# Altium PCB 400150.PcbDoc
Units mil, origin at the board's own origin, x right, y up, seen from the top; angles counter-clockwise.
Board outline 4000 x 2500 mil, 4 copper layers (Top Layer, Mid-Layer 1, Mid-Layer 2, Bottom Layer), stack 62.293 mil thick; 17 components, 98 nets, 82 pads, 16 vias.
Unrouted connection lines stored in the file: 17.
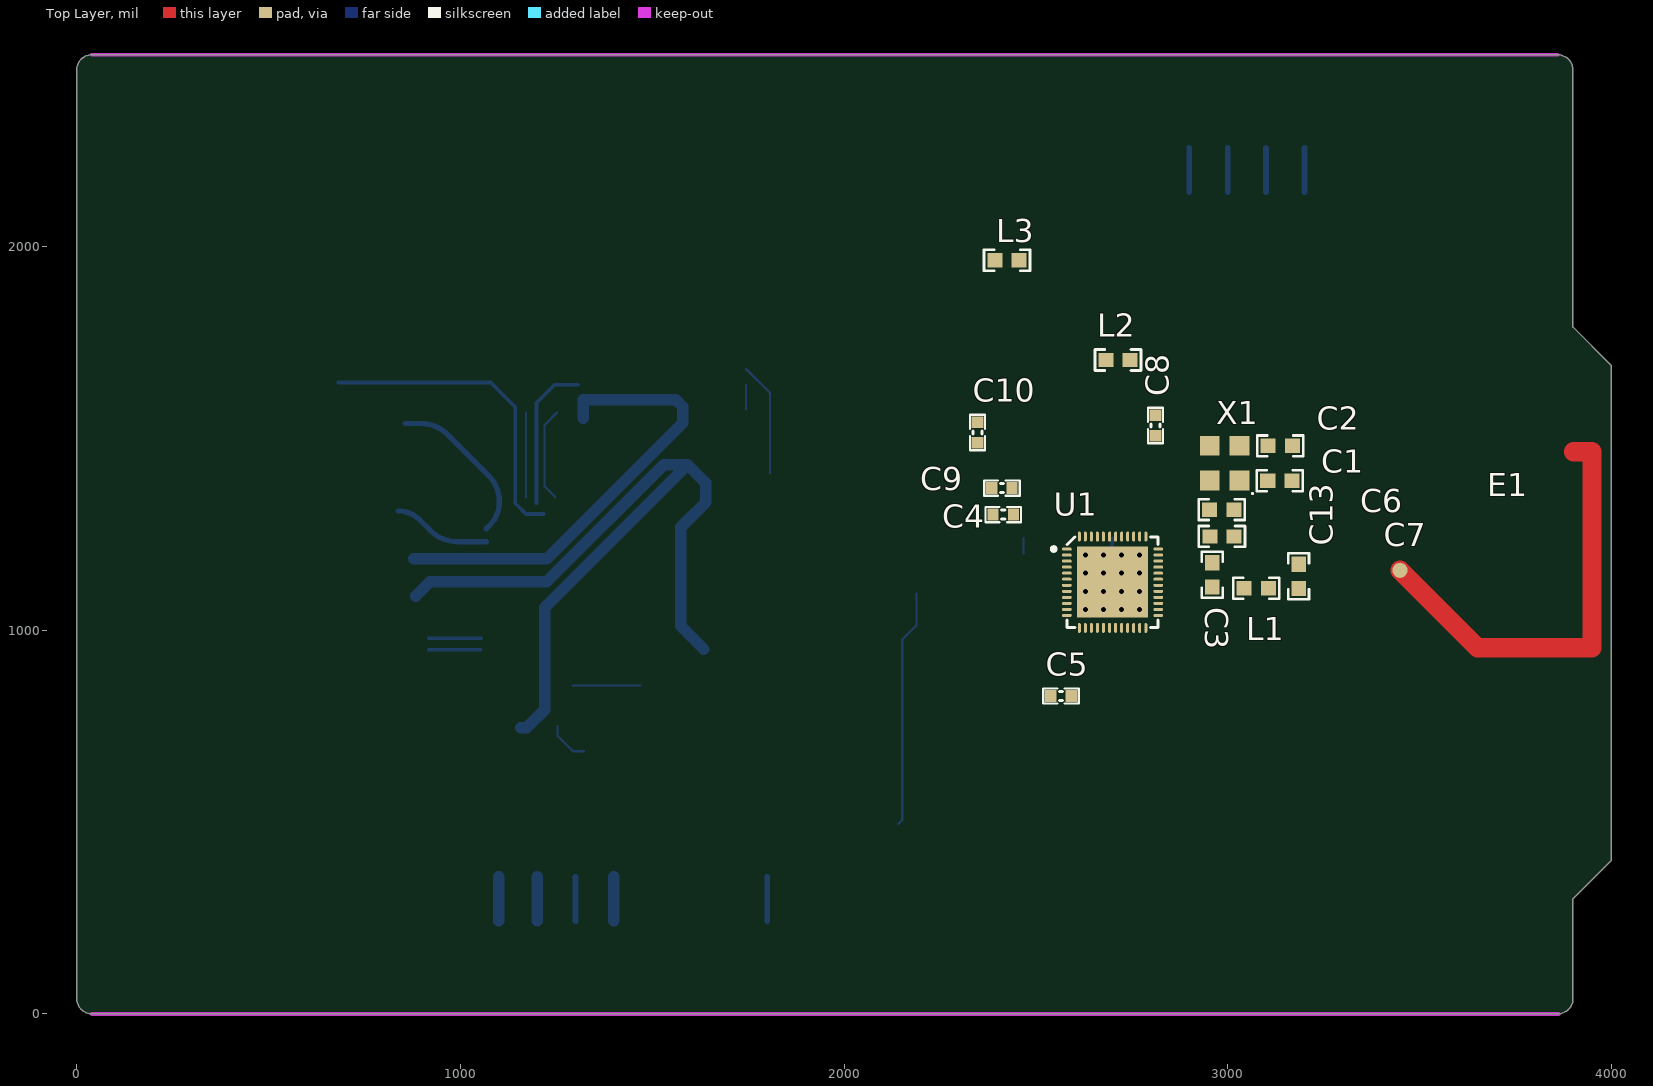
[diagram p0: Top Layer view]
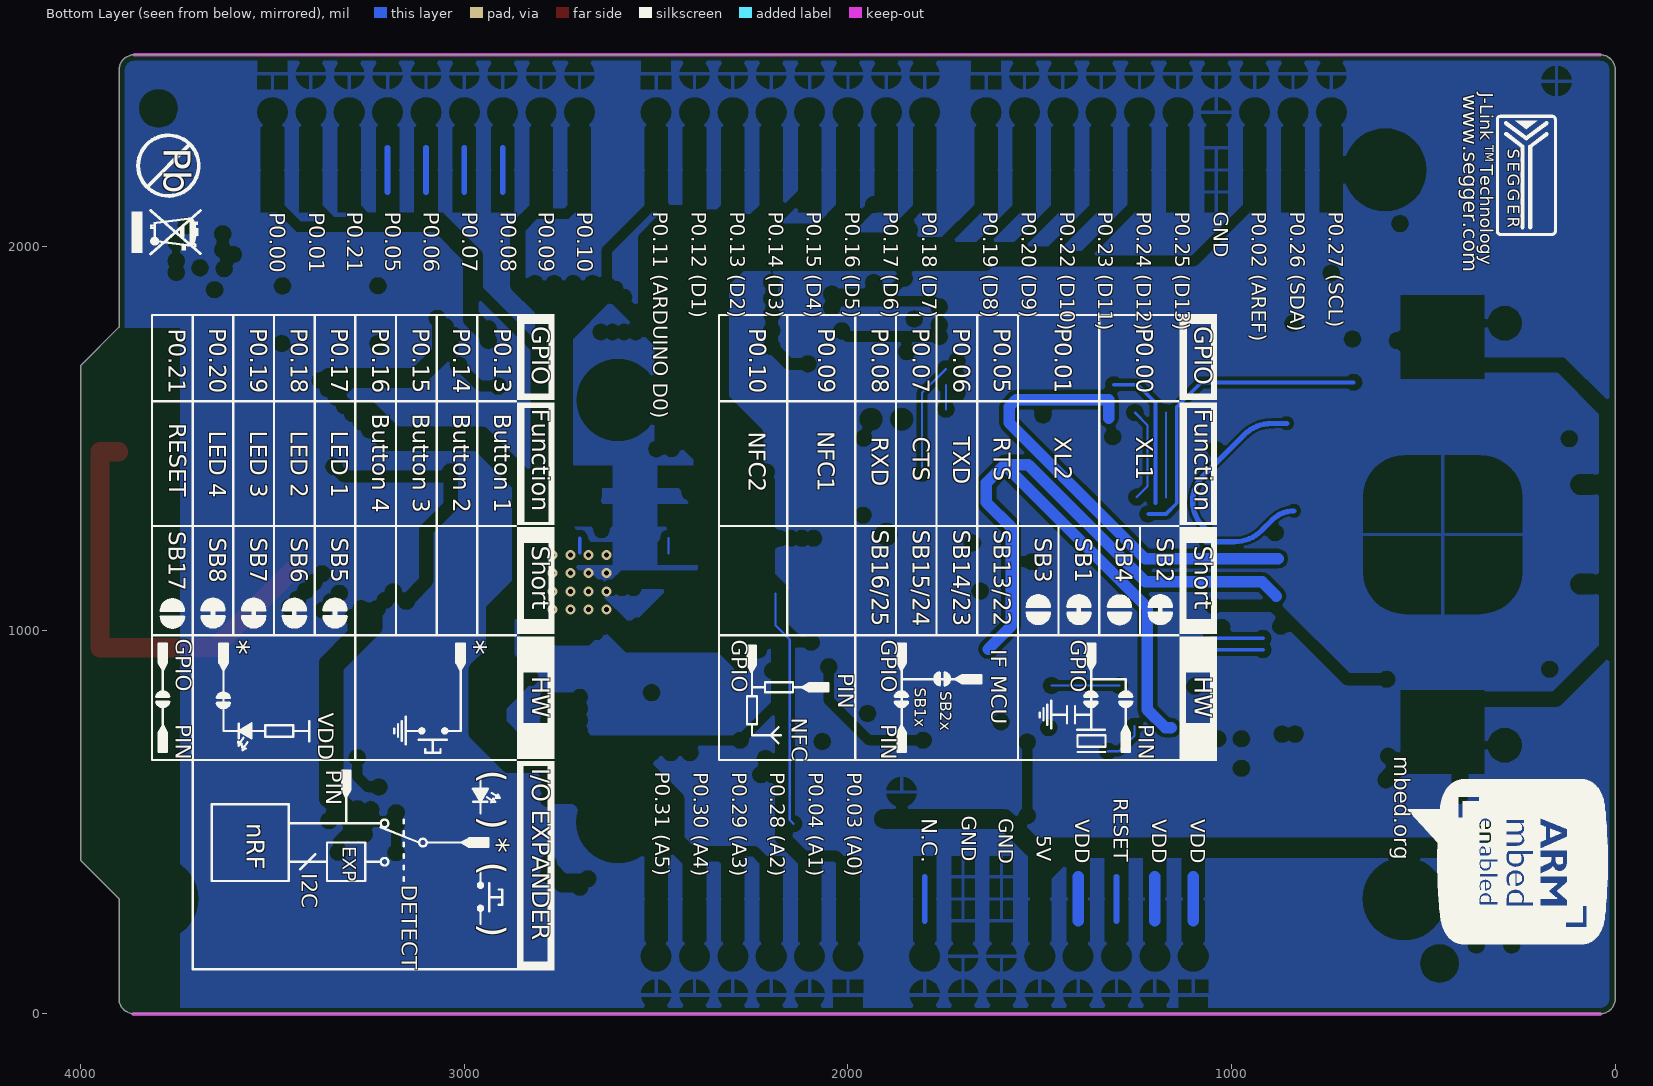
[diagram p1: Bottom Layer view, seen from below]
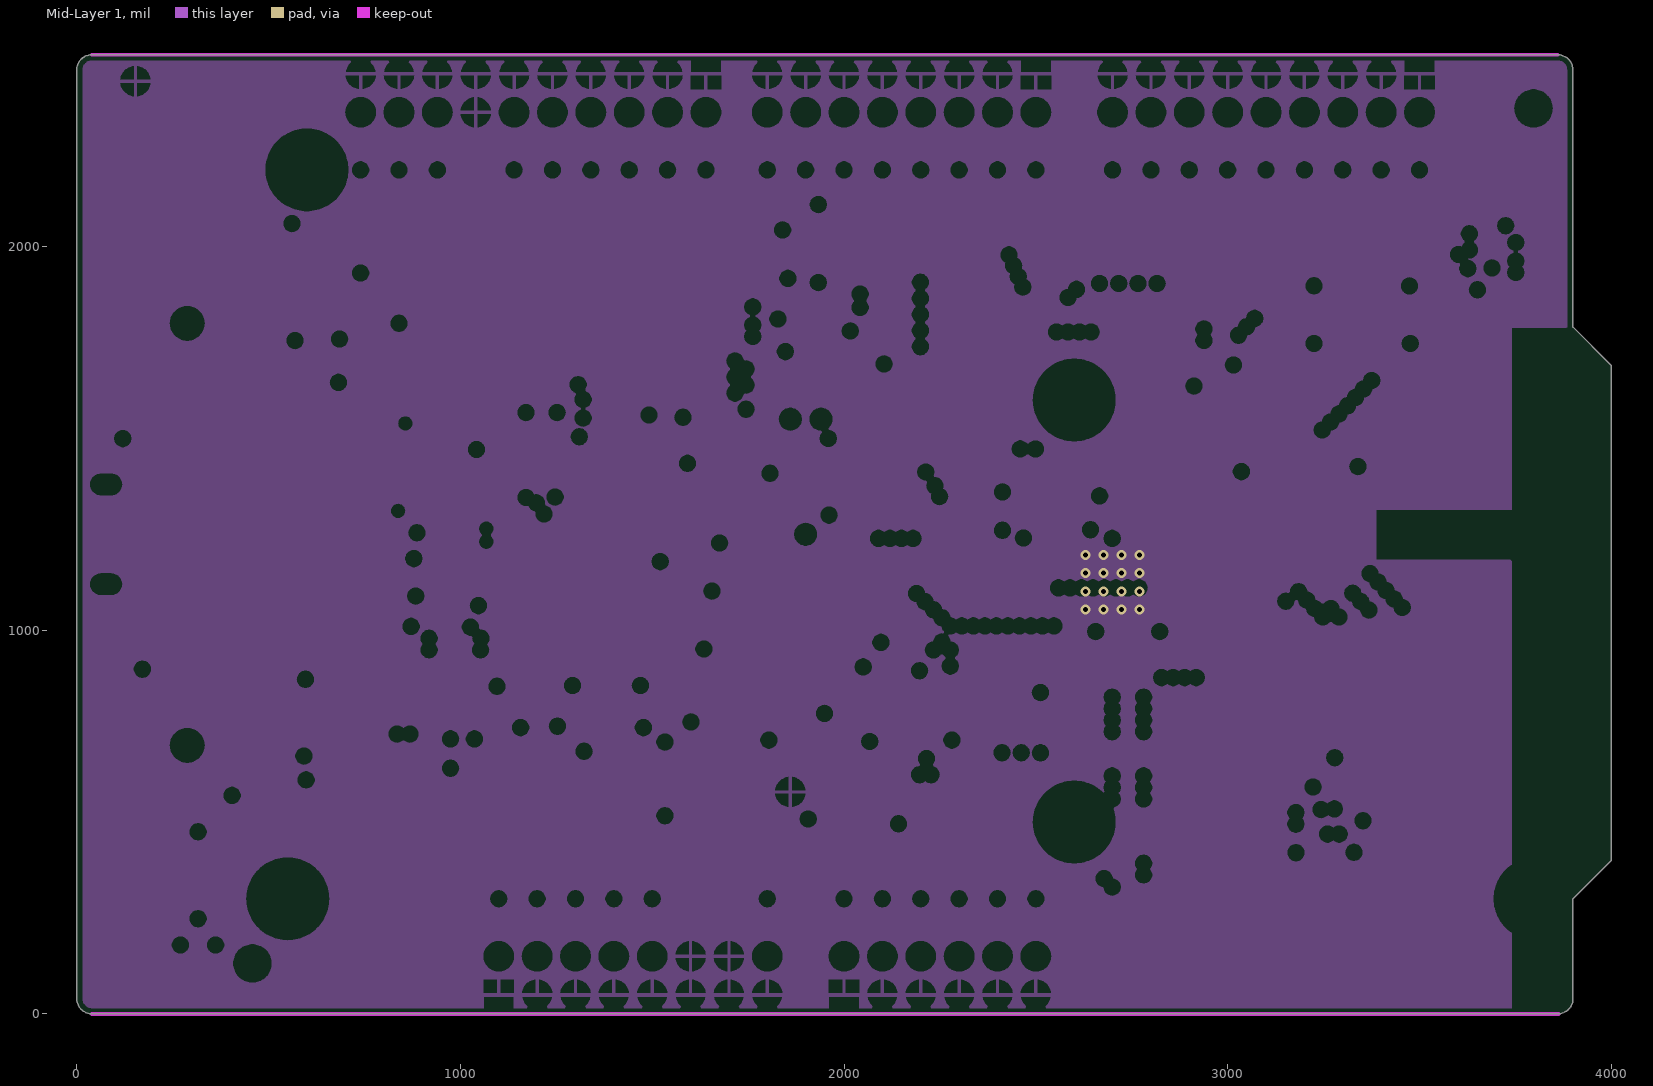
[diagram p2: Mid-Layer 1]
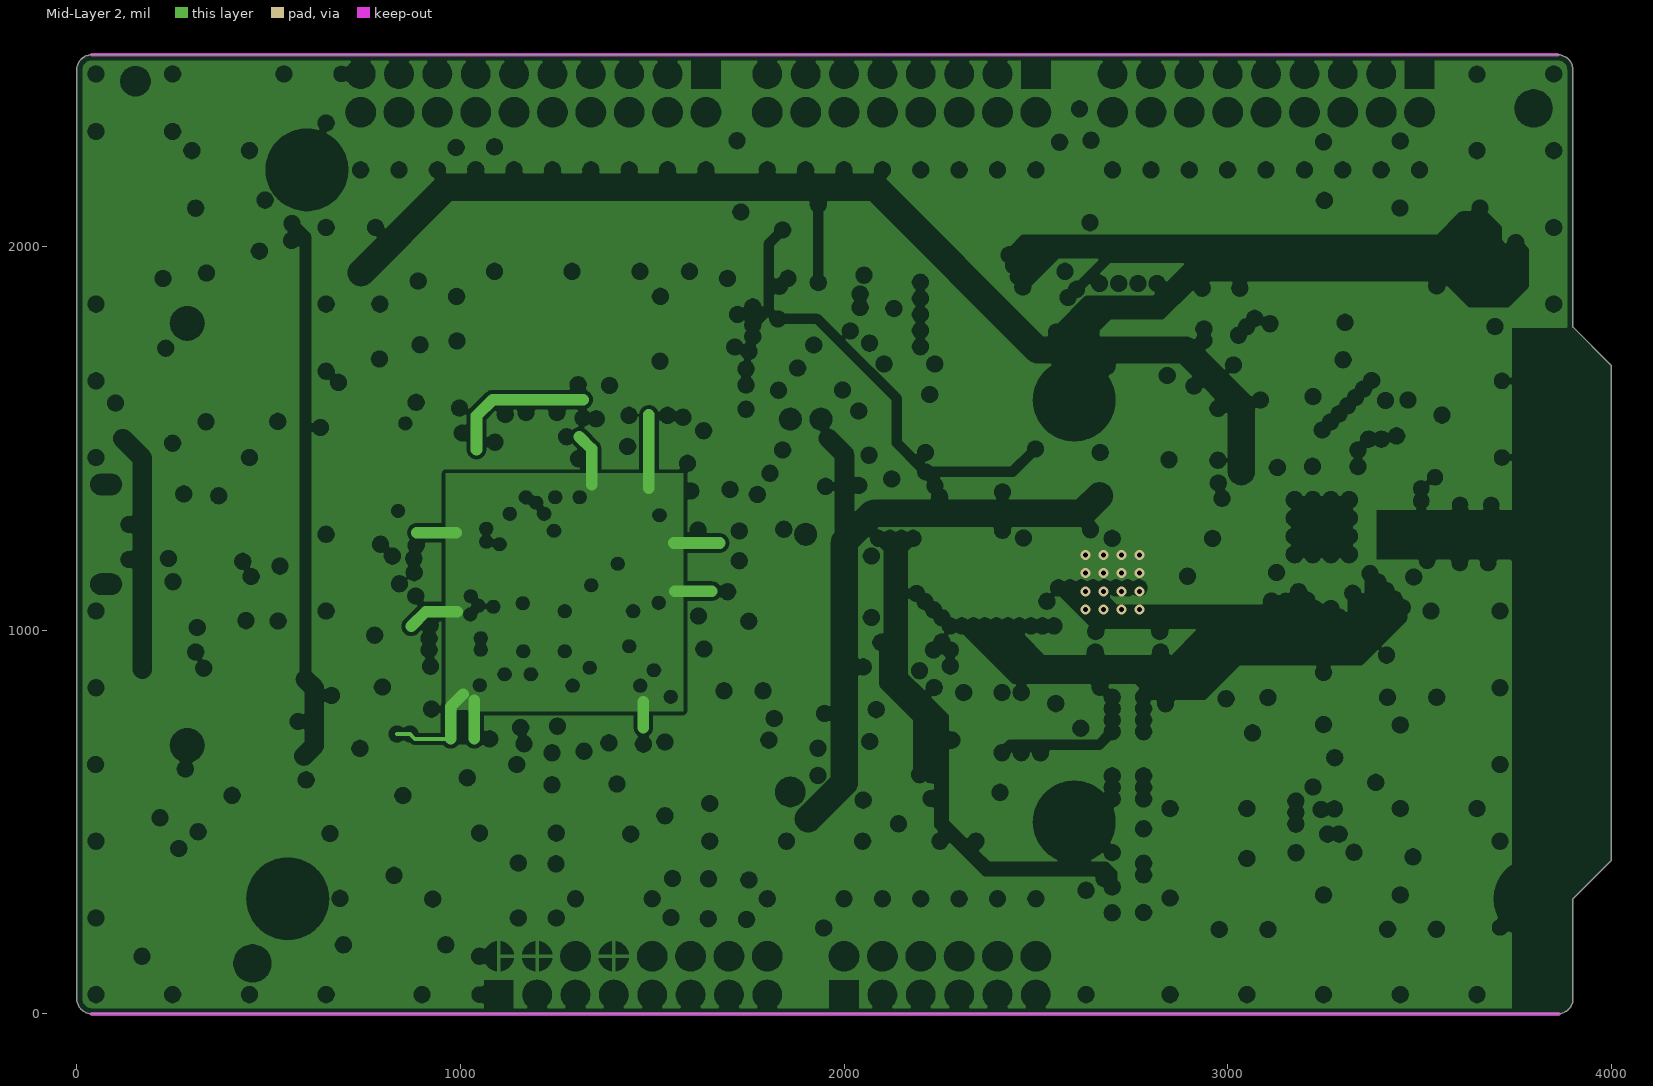
[diagram p3: Mid-Layer 2]

## Layer stack, top to bottom
Top Solder: solder mask 0.4, Solder Resist, Dk 3.5
Top Layer: signal copper 1.4
Dielectric1: prepreg 7.0866, FR-4, Dk 4.4
Mid-Layer 1: signal copper 1.4
Dielectric2: core 42.5197, FR-4, Dk 4.4
Mid-Layer 2: signal copper 1.4
Dielectric3: prepreg 7.0866, FR-4, Dk 4.4
Bottom Layer: signal copper 1.4
Bottom Solder: solder mask 0.4, Solder Resist, Dk 3.5

## Board outline
0,39.6 0,2460.6 cw(c39.5,2460.1) 40,2499.6 3860,2499.6 cw(c3860,2459.6) 3900,2459.6 3900,1789.6 4000,1689.6 4000,399.6 3900,299.6 3900,39.6 cw(c3860.5,39.1) 3861,-0.4 40,-0.4 cw(c40,39.6)

## Design rules (kind name [scope] priority, off if disabled: settings)
Clearance USB_Poly_Clearance [(InNamedPolygon('Top_Layer-GND')) vs (OnLayer('Mechanical 3'))] p1: gap=10
Clearance USB_Clearance [(InDifferentialPairClass('All Differential Pairs'))] p2: gap=6
Clearance ANT_Clerance [InNet('ANT') or InNet('RF')] p3: gap=8
Clearance Polygon_Clearance [(InNamedPolygon('Top_Layer-GND')) or (InNamedPolygon('Bottom_Layer-GND')) or (InNamedPolygon('Mid_Layer_1-GND')) or (InNamedPolygon('Mid_Layer_2-VDD'))] p4: gap=10
Clearance SB_Clearance [HasFootprint('Solderbridge') or HasFootprint('QFN40P180X140X55-10N')] p5: gap=5
Clearance CSP_Clearance [HasFootprint('BGA4C40P2X2_76X76X62')] p6: gap=5
Clearance P23_Clearance [HasFootprint('FPC_05P-0.5mm-RA-SMD')] p7: gap=5
Clearance [All] p8: gap=6
ComponentClearance [All] p1 off: gap=10 collisioncheckmode=3 verticalgap=10 showdistances=FALSE
DiffPairsRouting [All] p1: maxlimit=10 minlimit=5.91 mostfreqgap=10 toplayer_maxgap=5.91 toplayer_prefgap=5.91 toplayer_minwidth=8 toplayer_maxwidth=15 toplayer_prefwidth=15 midlayer1_mingap=10 midlayer1_minwidth=8 midlayer1_maxwidth=15 midlayer1_prefwidth=15 midlayer2_mingap=10 midlayer2_minwidth=8 midlayer2_maxwidth=15 midlayer2_prefwidth=15 bottomlayer_maxgap=5.91 bottomlayer_prefgap=5.91 bottomlayer_minwidth=8 bottomlayer_maxwidth=15 bottomlayer_prefwidth=15 maxuncoupledlength=500
FabricationTestPointUsage TestPointUsage [All] p1: valid=0 allowmultiple=FALSE
FabricationTestpoint Testpoint [All] p1: side=3 testpointundercomponent=TRUE minsize=40 maxsize=100 preferedsize=60 minholesize=0 maxholesize=40 preferedholesize=32 testpointgrid=1 allowsidetop=TRUE allowsidebottom=TRUE usegrid=TRUE gridtolerance=0.01
Height [All] p1 off: minheight=0 maxheight=1000 prefheight=500
HoleSize [All] p1: absolutevalues=TRUE maxlimit=196.85 minlimit=12 maxpercent=80.000 minpercent=20.000
MinimumAnnularRing [All] p1 off: minimumring=6
PolygonConnect PolygonConnect_1 [isVia and innet(gnd) or isVia and innet('VDD') or HasFootprint('COAXIAL-SWF') or isVia and innet('VDD_SAM')] p1: connectstyle=Direct reliefconductorwidth=10 reliefentries=4 polygonreliefangle="90 Angle" airgapwidth=10
PolygonConnect [All] p2: connectstyle=Relief reliefconductorwidth=10 reliefentries=4 polygonreliefangle="90 Angle" airgapwidth=10
RoutingVias [All] p1: holewidth=12 width=24 viastyle="Through Hole" minholewidth=12 minwidth=24 maxholewidth=28 maxwidth=50
SilkToSolderMaskClearance SilkscreenOverComponentPads [IsPad] p1: minsilkscreentomaskgap=10 clearancetoexposedcopper=TRUE
SolderMaskExpansion [All] p1: expansion=3
Width [All] p1: maxlimit=400 minlimit=6 preferedwidth=6 minimp=50.000000 maximp=50.000000 favimp=50.000000
23 further rules are at their usual default settings.

## Classes and differential pairs
component class pca10040_sheet1_radio: C1 C2 C3 C4 C5 C6 C7 C8 C9 C10 E1 L1 L2 L3 U1 X1

## Components (designator, comment, footprint, x,y, rotation, side; value= is the part's Value field where it differs from the comment)
C1 "12pF" 0603 3136,1389 r0 top
C2 "12pF" 0603 3137,1480 r0 top
C3 "0.8pF" 0603 2960,1144 r270 top
C4 "100nF" CAPC1608X06L 2415,1301 r180 top
C5 "100nF" CAPC1608X06L 2565.57,828 r0 top
C6 "N.C." 0603 2985,1244 r0 top
C7 "100pF" 0603 2984.5,1314 r0 top
C8 "100nF" CAPC1608X06L 2812,1533.43 r90 top
C9 "4.7µF" CAPC1608X06L 2411.43,1370 r180 top
C10 "1.0µF" CAPC1608X06L 2348,1515 r90 top
C13 "1.2pF" 0603 3185,1140 r90 top
E1 "Antenna" "PCB ANTENNE" 3655,1194 r180 top
L1 "3.9nH" 0603 3074.5,1109 r0 top
L2 "10µH" 0603 2714,1704 r0 top
L3 "15nH" 0603 2425,1964 r0 top
U1 "nRF52832-QFAA" QFN40P600X600X90-48N 2699.91,1124.63 r0 top
X1 "CX3225SB32000D0FFFCC" SON230P260X60-4N 2992,1435 r180 top

## Footprints (in the part's own frame and the unit in brackets; to place one, negate y for a bottom-side part, rotate by r counter-clockwise, add the part's x,y. Pads: shape width x height; smd on the part's side, far side on the other; paste and mask are expansions set on the pad)
0603 [mm] "0603 from SM-752 data"
  rect 1x0.95 smd: 1(-0.8,0) 2(0.8,0)
  silkscreen extent -1.52,-0.69 1.52,0.69, body extent -0.87,-0.47 0.87,0.47, height 1
CAPC1608X06L [mm]
  rect 0.75x0.8 smd: 1(-0.675,0) 2(0.675,0)
  silkscreen extent -1.17,-0.5 1.17,0.5, body extent -0.8,-0.43 0.8,0.43, height 0.8
"PCB ANTENNE" [mm]
  round 1 smd: 1(5.225,0.971)
  Top Layer lines w0.762: 5.2,0.945 5.2,0.907 ; -7.477,-6.851 -7.731,-6.825
  Top Layer lines w1.27: 5.225,0.971 0.092,6.103 ; -6.251,-6.876 -7.477,-6.876 ; -7.477,-6.851 -7.477,6.103 0.092,6.103 ; 0.093,6.103 0.092,6.103
QFN40P600X600X90-48N [mm]
  oval 0.65x0.2 smd: 1(-3.025,2.2) 2(-3.025,1.8) 3(-3.025,1.4) 4(-3.025,1) 5(-3.025,0.6) 6(-3.025,0.2) 7(-3.025,-0.2) 8(-3.025,-0.6) 9(-3.025,-1) 10(-3.025,-1.4) 11(-3.025,-1.8) 12(-3.025,-2.2) 25(3.025,-2.2) 26(3.025,-1.8) 27(3.025,-1.4) 28(3.025,-1) 29(3.025,-0.6) 30(3.025,-0.2) 31(3.025,0.2) 32(3.025,0.6) 33(3.025,1) 34(3.025,1.4) 35(3.025,1.8) 36(3.025,2.2)
  oval 0.2x0.65 smd: 13(-2.2,-3.025) 14(-1.8,-3.025) 15(-1.4,-3.025) 16(-1,-3.025) 17(-0.6,-3.025) 18(-0.2,-3.025) 19(0.2,-3.025) 20(0.6,-3.025) 21(1,-3.025) 22(1.4,-3.025) 23(1.8,-3.025) 24(2.2,-3.025) 37(2.2,3.025) 38(1.8,3.025) 39(1.4,3.025) 40(1,3.025) 41(0.6,3.025) 42(0.2,3.025) 43(-0.2,3.025) 44(-0.6,3.025) 45(-1,3.025) 46(-1.4,3.025) 47(-1.8,3.025) 48(-2.2,3.025)
  rect 4.7x4.7 smd: 49(0,0)
  silkscreen extent -4.02,-3 3,3, body extent -3.02,-3.02 3.02,3.02, height 0.86
SON230P260X60-4N [mm] "SON, 4-Leads, Body 3.25x2.55mm, Pitch 2.30mm, IPC Medium Density"
  rect 1.3x1.3 smd: 1(-0.985,1.15) 2(-0.985,-1.15) 3(0.985,-1.15) 4(0.985,1.15)
  silkscreen extent -1.9,1.96 -1.8,2.06, body extent -1.3,-1.65 1.3,1.65, height 0.6

## Part data
C1 C2: library part C0402-12p, "Capacitor, NP0, ±2%"
C3: library part C0402-0.8p, "Capacitor, NP0, ±5%"
C4 C5 C8: library part C0402-100n, "Capacitor, X7R, ±10%"
C6: library part C0402-N.C., "Not mounted"
C7: library part C0402-100p, "Capacitor, NP0, ±5%"
C9: library part C0603-4µ7, "Capacitor, X5R, ±10%"
C10: library part C0603-1µ0, "Capacitor, X7R, ±10%"
C13: library part C0402-1.2p, "Capacitor, NP0, ±0.1pF"
E1: "Generic Antenna"
L1: library part L0402-3n9, "Inductor, 170mA, ±0.1nH"
L2: library part L0603-10µ, "Inductor, 80mA, ±10%"
L3: library part L0402-15n, "Inductor, 320mA, ±5%"
U1: "Multi-protocol Bluetooth Low Energy and 2.4GHz proprietary system-on-chip"
X1: library part XTAL_SMD2016_32MHz_8pF_Epson, "XTAL SMD 2016, 32MHz, Cl=8pF, Tol: ±10ppm, Stab: ±10ppm"

## Via types
v1: diameter 25.98, hole 12.99, Top Layer to Bottom Layer, 16 vias

## Nets (pads, with @x,y where several pads share a name; then routed paths per layer and width w, separated by ;. In a path a pad name is that pad's centre, name@x,y a point inside that pad or via, vN(x,y) a via of type N, cw(c..) or ccw(c..) an arc to the next point about the centre after c; other vN are vias at no path point)
ANT: C13.1 L1.2
BOOT: 
BUTTON1: 
BUTTON1_EXT: 
BUTTON2: 
BUTTON2_EXT: 
BUTTON3: 
BUTTON3_EXT: 
BUTTON4: 
BUTTON4_EXT: 
DEC1: C4.1 U1.1
DEC2: C6.1 U1.32
DEC3: C7.1 U1.33
DEC4: C10.2 L3.1 U1.46
GND: C1.2 C2.2 C3.1 C4.2 C5.2 C6.2 C7.2 C8.2 C9.2 C10.1 C13.2 U1.31 U1.45 U1.49 X1.2 X1.4
  other v1: 2629.04,1053.76 2676.28,1053.76 2723.53,1053.76 2770.77,1053.76 2629.04,1101.01 2676.28,1101.01 2723.53,1101.01 2770.77,1101.01 2629.04,1148.25 2676.28,1148.25 2723.53,1148.25 2770.77,1148.25 2629.04,1195.5 2676.28,1195.5 2723.53,1195.5 2770.77,1195.5
INT_EXT: 
LED1: 
LED1_EXT: 
LED2: 
LED2_EXT: 
LED3: 
LED3_EXT: 
LED4: 
LED4_EXT: 
NetBat1_1: 
NetC3_2: C3.2 L1.1 U1.30
NetC11_2: 
NetC12_2: 
NetC17_2: 
NetD1_1: 
NetD1_4: 
NetD3_1: 
NetD4_1: 
NetD5_1: 
NetD6_1: 
NetL2_1: L2.1 L3.2
NetL2_2: L2.2 U1.47
NetLED1_1: 
NetLED1_2: 
NetLED2_1: 
NetLED2_2: 
NetLED3_1: 
NetLED3_2: 
NetLED4_1: 
NetLED4_2: 
NetR32_1: 
NetR37_1: 
NetSB30_2: 
NFC1: 
NFC2: 
P0.00: 
P0.01: 
P0.02: U1.4
P0.03: U1.5
P0.04: U1.6
P0.05: U1.7
P0.06: U1.8
P0.07: U1.9
P0.08: U1.10
P0.09: 
P0.09/NFC1: U1.11
P0.10: 
P0.10/NFC2: U1.12
P0.11: U1.14
P0.12: U1.15
P0.13: U1.16
P0.14: U1.17
P0.15: U1.18
P0.16: U1.19
P0.17: U1.20
P0.18: U1.21
P0.19: U1.22
P0.20: U1.23
P0.21: U1.24
P0.22: U1.27
P0.23: U1.28
P0.24: U1.29
P0.25: U1.37
P0.26: U1.38
P0.27: U1.39
P0.28: U1.40
P0.29: U1.41
P0.30: U1.42
P0.31: U1.43
SCL_EXT: 
SDA_EXT: 
SHIELD_DETECT: 
SWDCLK: U1.25
SWDIO: U1.26
V5V: 
VBUS: 
VDD: 
VDD_NRF: C5.1 C8.1 C9.1 U1.13 U1.36 U1.48
VEXT: 
XC1: C1.1 U1.34 X1.1
XC2: C2.1 U1.35 X1.3
XL1: U1.2
XL2: U1.3
pads on no net: E1.1 U1.44
copper on no net: | length 10107.7
  Mid-Layer 2 w10: 834.87,728.91 868.34,728.91 880.87,716.38 974.38,716.38
  Mid-Layer 2 w30: 871.61,1009.6 910.35,1048.34 991.83,1048.34 ; 886.61,1253.6 988.83,1253.6 ; 974.38,716.38 974.38,799.88 1006.83,832.34 ; 1036.44,716.37 1036.44,817.34 ; 1042,1470.6 1042,1558.6 1084,1600.6 1320,1600.6 ; 1310,1503.92 1341.83,1472.09 1341.83,1378.34 ; 1477,745.6 1477,813.34 ; 1491.61,1369.34 1491.61,1560.6 ; 1555.83,1226.91 1675.61,1226.91 ; 1558.83,1101.6 1655.61,1101.6
  Bottom Layer w6: 1171,1345.6 1171,1566.92 ; 1247,1346.6 1219,1374.6 1219,1533.92 1252,1566.92 ; 1252.92,749.37 1252.92,724.54 1293.46,684 1322.35,684 ; 1292.29,855.37 1469.29,855.37 ; 1744.69,1575.6 1744.69,1638.6 ; 1744.69,1680.6 1807,1618.29 1807,1408.6 ; 2142,495 2152,505 2152,975.32 2189,1012.32 2189,1095 ; 2467.69,1199.6 2467.69,1240
  Bottom Layer w10: 682,1645.6 1079,1645.6 1143,1581.6 1143,1330.6 1171,1302.6 1217,1302.6 ; 918.61,948.6 1052.61,948.6 ; 918.61,978.6 1053.61,978.6 ; 1198,1331.6 1198,1592.6 1245,1639.6 1307,1639.6 ; 2699,1201.6 2699,1239
  Bottom Layer w13.78: 837.61,1310.6 cw(c837.61,1230.93) 893.94,1287.27 921.68,1259.53 ccw(c992.39,1330.24) 992.39,1230.24 1067.61,1230.24 ; 856.61,1538.6 896.18,1538.6 cw(c896.18,1438.6) 966.9,1509.31 1073.32,1402.88 cw(c1005.04,1334.6) 1101.61,1334.6 cw(c1013.82,1334.6) 1075.89,1272.53 1067.61,1264.24
  Bottom Layer w15: 1300,241.92 1300,299.6 1300,357.28 ; 1800,241.92 1800,299.6 1800,357.28 ; 2900,2141.92 2900,2199.6 2900,2257.28 ; 3000,2141.92 3000,2199.6 3000,2257.28 ; 3100,2141.92 3100,2199.6 3100,2257.28 ; 3200,2141.92 3200,2199.6 3200,2257.28
  Bottom Layer w30: 878.61,1186.13 1225.53,1186.13 1580,1540.6 1580,1554.6 1580,1581.6 1561,1600.6 1320,1600.6 1320,1552.6 ; 883.61,1088.6 920.61,1125.6 1224.61,1125.6 1530,1430.99 1592,1430.99 ; 1100,241.92 1100,357.28 ; 1157,745.6 1172.61,745.6 1219.61,792.6 1219.61,1058.6 1592,1430.99 ; 1200,241.92 1200,357.28 ; 1400,241.92 1400,357.28 ; 1634.61,950.6 1574.61,1010.6 1574.61,1267.76 1639.61,1332.76 1639.61,1383.39 1592,1430.99

## Polygon pours and split planes (outlines as drawn)
no net on Mid-Layer 2 "NONET_L03_P008" (solid, pour order 8): 962,1408.34 962,788.6 1580.83,788.6 1580.83,1408.34
VDD on Mid-Layer 2 "Mid_Layer_2-VDD" (solid, remove dead copper, pour order 10): -104.87,-142.03 -104.87,2619.48 -96.26,2635.53 4116.93,2635.53 4127.69,2655.6 4127.69,-134 4132,-142.03
GND on Mid-Layer 1 "Mid_Layer_1-GND" (solid, remove dead copper, pour order 7): -138.74,-96.93 -138.74,2579.59 -129.94,2595.15 4177.59,2595.15 4188.6,2614.6 4188.6,-89.15 4193,-96.93
GND on Bottom Layer "Bottom_Layer-GND" (solid, remove dead copper, pour order 6): -410.29,-103.54 -410.29,2687.09 -400.99,2703.32 4149.72,2703.32 4161.35,2723.6 4161.35,-95.43 4166,-103.54

## Keep-outs
Keep-Out Layer:
  lines w10: 40,-0.4 3862,-0.4 ; 40,2499.6 3860,2499.6

## Other copper
Mid-Layer 1:
  pour cut-out: 3742.87,1183.16 3386.87,1183.16 3386.87,1313.16 3742.87,1313.16
  pour cut-out: 3739.97,-50.4 4010.28,-50.4 4008.77,1787.6 3740.14,1787.6
Mid-Layer 2:
  pour cut-out: 990.83,792.34 990.83,702.34 1020.83,702.34 1020.83,792.34
  pour cut-out: 3742.87,1183.16 3386.87,1183.16 3386.87,1313.16 3742.87,1313.16
  pour cut-out: 3739.97,-50.4 4010.28,-50.4 4008.77,1787.6 3740.14,1787.6
Bottom Layer:
  pour cut-out: 3739.97,-50.4 4010.28,-50.4 4008.77,1787.6 3740.14,1787.6

## Silkscreen, mask and mechanical layers (free items; w line width, h text height)
Bottom Overlay:
  drawing of 11657 lines, arcs and shapes, not listed
  text "J-Link" at 363.88,2400.2 h57 r90
  text "www.segger.com" at 409.18,2397 h66 r90
  text "TM" at 347.28,2263.6 h37 r90
  text "Pb" at 3807.28,2257.6 h120 r90
  text "S" at 290.67,2255.2 h53 r90
  text "E" at 290.67,2220.17 h53 r90
  text "Technology" at 363.88,2213.1 h57 r90
  text "G" at 290.67,2189.3 h53 r90
  text "G" at 290.67,2150.3 h53 r90
  text "E" at 290.67,2110 h53 r90
  text "P0.27 (SCL)" at 760,2090.6 h65 r90
  text "P0.26 (SDA)" at 860,2090.6 h65 r90
  text "P0.02 (AREF)" at 960,2090.6 h65 r90
  text "GND" at 1060,2090.6 h65 r90
  text "P0.25 (D13)" at 1160,2090.6 h65 r90
  text "P0.24 (D12)" at 1260,2090.6 h65 r90
  text "P0.23 (D11)" at 1360,2090.6 h65 r90
  text "P0.22 (D10)" at 1460,2090.6 h65 r90
  text "P0.20 (D9)" at 1560,2090.6 h65 r90
  text "P0.19 (D8)" at 1660,2090.6 h65 r90
  text "P0.18 (D7)" at 1820,2090.6 h65 r90
  text "P0.17 (D6)" at 1920,2090.6 h65 r90
  text "P0.16 (D5)" at 2020,2090.6 h65 r90
  text "P0.15 (D4)" at 2120,2090.6 h65 r90
  text "P0.14 (D3)" at 2220,2090.6 h65 r90
  text "P0.13 (D2)" at 2320,2090.6 h65 r90
  text "P0.12 (D1)" at 2420,2090.6 h65 r90
  text "P0.11 (ARDUINO D0)" at 2520,2090.6 h65 r90
  text "P0.10" at 2720,2090.6 h70 r90
  text "P0.09" at 2820,2090.6 h70 r90
  text "P0.08" at 2920,2090.6 h70 r90
  text "P0.07" at 3020,2090.6 h70 r90
  text "P0.06" at 3120,2090.6 h70 r90
  text "P0.05" at 3220,2090.6 h70 r90
  text "P0.21" at 3320,2090.6 h70 r90
  text "P0.00" at 3521,2089.6 h70 r90
  text "P0.01" at 3419,2089.28 h70 r90
  text "R" at 290.67,2077.1 h53 r90
  text "GPIO" at 1112,1791.95 h78.5 r90
  text "GPIO" at 2839,1791.95 h78.5 r90
  text "P0.00" at 1263,1787.09 h75 r90
  text "P0.01" at 1475,1787.09 h75 r90
  text "P0.05" at 1634,1787.09 h75 r90
  text "P0.06" at 1740,1787.09 h75 r90
  text "P0.07" at 1846,1787.09 h75 r90
  text "P0.08" at 1952,1787.09 h75 r90
  text "P0.09" at 2092,1787.09 h75 r90
  text "P0.10" at 2272,1787.09 h75 r90
  text "P0.13" at 2937,1787.09 h75 r90
  text "P0.14" at 3043,1787.09 h75 r90
  text "P0.15" at 3149,1787.09 h75 r90
  text "P0.16" at 3255,1787.09 h75 r90
  text "P0.17" at 3361,1787.09 h75 r90
  text "P0.18" at 3467,1787.09 h75 r90
  text "P0.19" at 3573,1787.09 h75 r90
  text "P0.20" at 3679,1787.09 h75 r90
  text "P0.21" at 3785,1785.09 h75 r90
  text "Function" at 1112,1576.6 h78.5 r90
  text "Function" at 2839,1576.6 h78.5 r90
  text "Button 1" at 2937,1564.09 h75 r90
  text "Button 2" at 3043,1564.09 h75 r90
  text "Button 3" at 3149,1564.09 h75 r90
  text "Button 4" at 3255,1564.09 h75 r90
  text "RESET" at 3784,1539.09 h75 r90
  text "LED 1" at 3361,1519.09 h75 r90
  text "LED 2" at 3467,1519.09 h75 r90
  text "LED 3" at 3573,1519.09 h75 r90
  text "LED 4" at 3679,1519.09 h75 r90
  text "NFC1" at 2093,1518.09 h75 r90
  text "NFC2" at 2273,1517.09 h75 r90
  text "XL1" at 1263,1504.09 h75 r90
  text "XL2" at 1475,1504.09 h75 r90
  text "RTS" at 1634,1504.09 h75 r90
  text "TXD" at 1740,1504.09 h75 r90
  text "CTS" at 1846,1504.09 h75 r90
  text "RXD" at 1952,1504.09 h75 r90
  text "SB13/22" at 1634,1261.09 h75 r90
  text "SB14/23" at 1740,1261.09 h75 r90
  text "SB15/24" at 1846,1261.09 h75 r90
  text "SB16/25" at 1952,1261.09 h75 r90
  text "SB17" at 3785,1257.09 h75 r90
  text "SB2" at 1210,1241.09 h75 r90
  text "SB4" at 1316,1241.09 h75 r90
  text "SB1" at 1422,1241.09 h75 r90
  text "SB3" at 1528,1241.09 h75 r90
  text "SB5" at 3361,1241.09 h75 r90
  text "SB6" at 3467,1241.09 h75 r90
  text "SB7" at 3573,1241.09 h75 r90
  text "SB8" at 3679,1241.09 h75 r90
  text "Short" at 1112,1219.28 h78.5 r90
  text "Short" at 2839,1219.28 h78.5 r90
  text "GPIO" at 3766,977.09 h70 r90
  text "GPIO" at 2316.73,974.69 h70 r90
  text "GPIO" at 1433.72,974.09 h70 r90
  text "GPIO" at 1927.72,974.09 h70 r90
  text "*" at 3017.45,974.09 h100 r90
  text "*" at 3635.45,974.09 h100 r90
  text "IF MCU" at 1641,950.59 h70 r90
  text "PIN" at 2039.28,887.69 h70 r90
  text "HW" at 1112,879.28 h78.5 r90
  text "HW" at 2839,879.28 h78.5 r90
  text "SB1x" at 1836,850.09 h50 r90
  text "SB2x" at 1770,841.09 h50 r90
  text "VDD" at 3395,785.09 h70 r90
  text "NFC" at 2160.28,771.69 h70 r90
  text "PIN" at 1256.22,755.09 h70 r90
  text "PIN" at 1927.72,755.09 h70 r90
  text "PIN" at 3766.22,755.01 h70 r90
  text "mbed.org" at 590,671 h70 r90
  text "I/O EXPANDER" at 2839,639.28 h78.5 r90
  text "(" at 2978,636.09 h120 r90
  text "PIN" at 3374,636.34 h70 r90
  text "P0.03 (A0)" at 2015,630 h65 r90
  text "P0.04 (A1)" at 2115,629.6 h65 r90
  text "P0.28 (A2)" at 2215,629.6 h65 r90
  text "P0.29 (A3)" at 2315,629.6 h65 r90
  text "P0.31 (A5)" at 2515,630.28 h65 r90
  text "P0.30 (A4)" at 2414.75,628.92 h65 r90
  text "RESET" at 1319.75,561.47 h65 r90
  text ")" at 2978,516.09 h120 r90
  text "GND" at 1716.75,515.45 h65 r90
  text "GND" at 1619.75,509.45 h65 r90
  text "N.C." at 1821.75,509.45 h70 r90
  text "VDD" at 1120,506.28 h65 r90
  text "VDD" at 1220,506.28 h65 r90
  text "VDD" at 1420,506.28 h65 r90
  text "nRF" at 3583,496.09 h80 r90
  text "5V" at 1521,465.28 h65 r90
  text "*" at 2958,459.09 h100 r90
  text "EXP" at 3328,436.09 h60 r90
  text "(" at 2978,396.09 h120 r90
  text "I2C" at 3438,366.09 h70 r90
  text "DETECT" at 3178,336.09 h70 r90
  text ")" at 2978,236.09 h120 r90
Mechanical 1:
  circle w0.5: c-5790.19,-6839.33 r0.65
  circle w0.5: c-5797.81,-6836.79 r0.65
  circle w0.5: c-5797.81,-6852.03 r0.65
  circle w0.5: c-5790.19,-6852.03 r0.65
  circle w0.5: c-5801.19,-6839.33 r0.65
  circle w0.5: c-5808.81,-6836.79 r0.65
  circle w0.5: c-5808.81,-6852.03 r0.65
  circle w0.5: c-5801.19,-6852.03 r0.65
  lines w0.5: -5828.83,-6859.69 -5770.17,-6859.69 ; -5828.83,-6828.66 -5770.17,-6828.66 ; -5825.15,-6813.68 -5825.15,-6822.18 ccw(c-5822,-6822.18) -5818.85,-6822.18 -5818.85,-6813.68 ; -5818.15,-6813.68 -5818.15,-6822.18 ccw(c-5815,-6822.18) -5811.85,-6822.18 -5811.85,-6813.68 ; -5807.12,-6874.68 -5807.12,-6873.18 ; -5806.12,-6874.68 -5806.12,-6873.18 ; -5792.87,-6874.68 -5792.87,-6873.18 ; -5791.87,-6874.68 -5791.87,-6873.18 ; -5787.15,-6813.68 -5787.15,-6822.18 ccw(c-5784,-6822.18) -5780.85,-6822.18 -5780.85,-6813.68 ; -5780.15,-6813.68 -5780.15,-6822.18 ccw(c-5777,-6822.18) -5773.85,-6822.18 -5773.85,-6813.68 ; -5828.2,-6862.68 ccw(c-5828.2,-6862.18) -5828.2,-6861.68 ; -5828.2,-6862.68 -5830,-6862.68 -5830,-6870.18 ccw(c-5825.5,-6870.18) -5825.5,-6874.68 -5773.5,-6874.68 ccw(c-5773.5,-6870.18) -5769,-6870.18 -5769,-6862.68 -5770.8,-6862.68 ; -5828.2,-6862.68 -5826.7,-6862.68 -5826.7,-6861.68 -5828.2,-6861.68 ; -5828.2,-6861.68 -5830,-6861.68 -5830,-6855.99 cw(c-5827,-6855.99) -5827.86,-6853.11 ccw(c-5830,-6845.93) -5822.5,-6845.93 -5822.5,-6842.43 ccw(c-5830,-6842.43) -5827.86,-6835.24 cw(c-5827,-6832.37) -5830,-6832.37 -5830,-6826.68 -5828.2,-6826.68 ; -5828.2,-6826.68 ccw(c-5828.2,-6826.18) -5828.2,-6825.68 ; -5828.2,-6826.68 -5826.7,-6826.68 -5826.7,-6825.68 -5828.2,-6825.68 ; -5828.2,-6825.68 -5830,-6825.68 -5830,-6818.18 cw(c-5825.5,-6818.18) -5825.5,-6813.68 -5773.5,-6813.68 cw(c-5773.5,-6818.18) -5769,-6818.18 -5769,-6825.68 -5770.8,-6825.68 ; -5825.85,-6822.18 ccw(c-5822,-6822.18) -5818.5,-6823.78 ; -5825.85,-6822.18 ccw(c-5822,-6822.18) -5818.5,-6823.78 ; -5825.85,-6822.18 -5825.85,-6813.69 -5825.85,-6822.18 ; -5818.5,-6823.78 ccw(c-5815,-6822.18) -5811.15,-6822.18 ; -5818.5,-6823.78 ccw(c-5815,-6822.18) -5811.15,-6822.18 ; -5811.15,-6822.18 -5811.15,-6813.68 -5811.15,-6822.18 ; -5807.12,-6873.18 -5806.12,-6873.18 ; -5807.12,-6873.18 -5806.12,-6873.18 ; -5792.87,-6873.18 -5791.87,-6873.18 ; -5792.87,-6873.18 -5791.87,-6873.18 ; -5787.85,-6822.18 ccw(c-5784,-6822.18) -5780.5,-6823.78 ; -5787.85,-6822.18 ccw(c-5784,-6822.18) -5780.5,-6823.78 ; -5787.85,-6822.18 -5787.85,-6813.68 -5787.85,-6822.18 ; -5780.5,-6823.78 ccw(c-5777,-6822.18) -5773.15,-6822.18 ; -5780.5,-6823.78 ccw(c-5777,-6822.18) -5773.15,-6822.18 ; -5773.15,-6822.18 -5773.15,-6813.69 -5773.15,-6822.18 ; -5772.3,-6826.68 -5770.8,-6826.68 ; -5772.3,-6826.68 -5772.3,-6825.68 ; -5772.3,-6826.68 -5772.3,-6825.68 ; -5772.3,-6825.68 -5770.8,-6825.68 ; -5770.8,-6862.68 cw(c-5770.8,-6862.18) -5770.8,-6861.68 ; -5770.8,-6862.68 -5772.3,-6862.68 -5772.3,-6861.68 -5770.8,-6861.68 ; -5770.8,-6861.68 -5769,-6861.68 -5769,-6855.99 ccw(c-5772,-6855.99) -5771.14,-6853.11 cw(c-5769,-6845.93) -5776.5,-6845.93 -5776.5,-6842.43 cw(c-5769,-6842.43) -5771.14,-6835.24 ccw(c-5772,-6832.37) -5769,-6832.37 -5769,-6826.68 -5770.8,-6826.68 ; -5770.8,-6826.68 cw(c-5770.8,-6826.18) -5770.8,-6825.68 ; -5823.05,-6823.58 ccw(c-5822,-6823.58) -5820.95,-6823.58 -5820.95,-6820.78 ccw(c-5822,-6820.78) -5823.05,-6820.78 -5823.05,-6823.58 ; -5819.1,-6824.68 ccw(c-5818.5,-6824.68) -5817.9,-6824.68 -5817.9,-6816.68 ccw(c-5818.5,-6816.68) -5819.1,-6816.68 -5819.1,-6824.68 ; -5816.05,-6823.58 ccw(c-5815,-6823.58) -5813.95,-6823.58 -5813.95,-6820.78 ccw(c-5815,-6820.78) -5816.05,-6820.78 -5816.05,-6823.58 ; -5785.05,-6823.58 ccw(c-5784,-6823.58) -5782.95,-6823.58 -5782.95,-6820.78 ccw(c-5784,-6820.78) -5785.05,-6820.78 -5785.05,-6823.58 ; -5781.1,-6824.68 ccw(c-5780.5,-6824.68) -5779.9,-6824.68 -5779.9,-6816.68 ccw(c-5780.5,-6816.68) -5781.1,-6816.68 -5781.1,-6824.68 ; -5778.05,-6823.58 ccw(c-5777,-6823.58) -5775.95,-6823.58 -5775.95,-6820.78 ccw(c-5777,-6820.78) -5778.05,-6820.78 -5778.05,-6823.58
  lines w10: 40,-0.4 3861,-0.4 ; 40,2499.6 3860,2499.6